# EAGLE board adns5090_breakout (EAGLE 9.7.0)
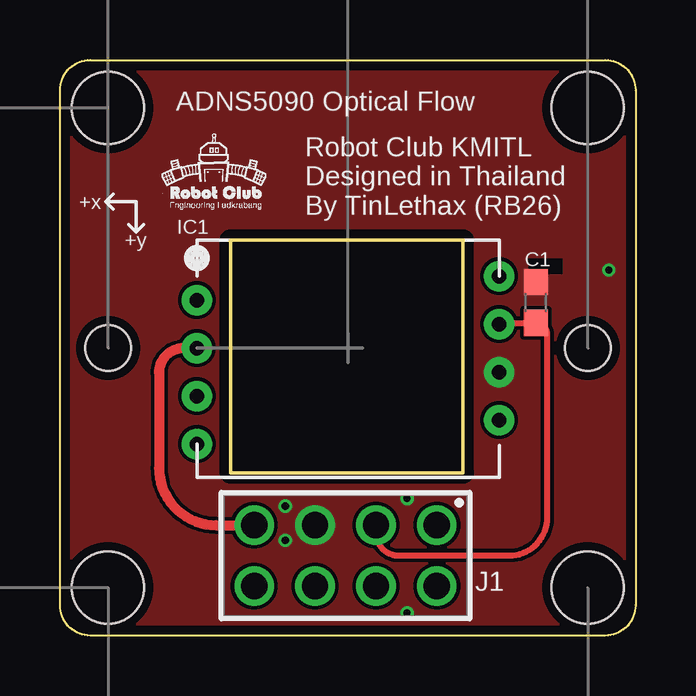
[diagram p0: board, top side]
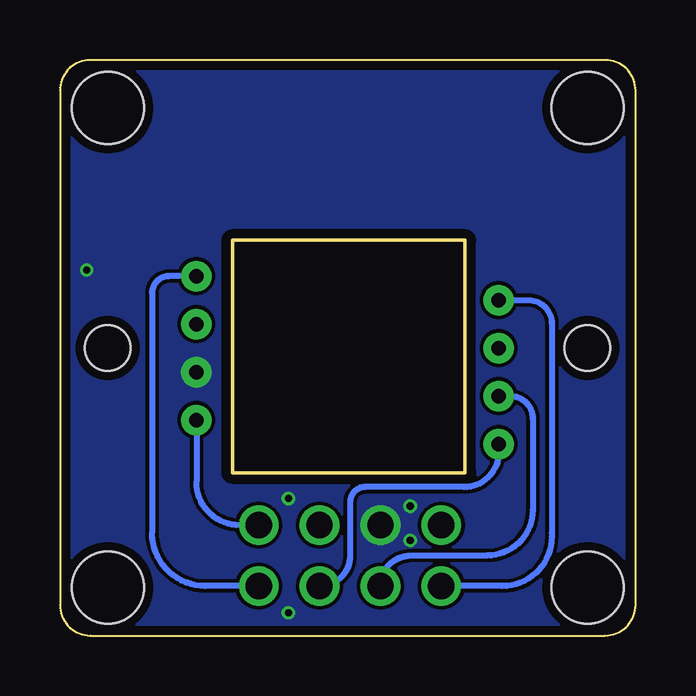
[diagram p1: board, bottom side, seen from below]

Size 24 x 24 mm. Coordinates in mm from the lower left corner, seen from the top.
Outline: 0,1.27 0,22.73 arc-90 1.27,24 22.73,24 arc-90 24,22.73 24,1.27 arc-90 22.73,0 1.27,0 arc-90 0,1.27
Copper layers (1*16): Top 0.035559375mm / dielectric 1.6mm / Bottom 0.035559375mm
Design rules "oshpark-2layer.edru": minimum track width 6mil, minimum drill 10mil, track to track 6mil, track to pad 6mil, pad to pad 6mil, via to via 6mil, smd to smd 6mil, copper to edge 15mil, drill to drill 6mil, minimum pad ring 5mil, minimum via ring 5mil, stop-mask expansion 2.5mil, vias tented up to drill 0mil, thermal gap 10mil
Holes 1.9 mm at 22.01,11.98 2.01,11.98
Holes 3 mm at 2,2 22,2 2,22 22,22
tRestrict: area 8.1,7.8 to 16,15.7; area 19.5,15.1 to 21,15.7

## Footprints (pad centres in the part's own frame; a part is rotated, then mirrored left to right if it is on the bottom)
C0603 = smd 1.1 x 1: 1 -0.85,0; 2 0.85,0
WEIRD_DIP8 = drill 0.6 pad 1.27: P$1 -6.3,2; P$2 -6.3,0; P$3 -6.3,-2; P$4 -6.3,-4; P$5 6.3,-3; P$6 6.3,-1; P$7 6.3,1; P$8 6.3,3
61300821121 = drill 1.1: 1 -3.81,-1.27; 2 -3.81,1.27; 3 -1.27,-1.27; 4 -1.27,1.27; 5 1.27,-1.27; 6 1.27,1.27; 7 3.81,-1.27; 8 3.81,1.27

## Placement (x,y rotation side)
C1  0.1uF  [C0603]  19.84,13.89 90 top
IC1  ADNS5090  [WEIRD_DIP8]  12.01,11.98 0 top
J1  61300821121  [61300821121]  11.91,3.33 180 top

## Library data of the parts
C1 = adafruit
IC1 = adns_5050
J1 = Wurth_Connectors_WR-PHD; DATASHEET-URL: https://www.we-online.com/catalog/datasheet/61300821121.pdf; GENDER: Pin Header; IR: 3A; MOUNT: THT; PACKAGING: Bag; PART-NUMBER: 61300821121; PINS: 8; PITCH: 2.54mm; ROWS: Dual; TYPE: Board Stacker

## Nets
3V3: C1.1 IC1.P$7 J1.3
/CS: IC1.P$4 J1.4
CLK: IC1.P$5 J1.1
GND: C1.2 IC1.P$6 J1.5
INT: IC1.P$3 J1.6
LED_K: IC1.P$2 J1.7
SI: IC1.P$8 J1.2
SO: IC1.P$1 J1.8

## Tracks (layer width: path | path; a pad name or v marks a point on that pad's centre or on a via)
3V3
  Top 0.254: J1.3 13.18,4.29 arc90 14.13,3.33 18.73,3.33 arc90 20.32,4.92 20.32,12.56 arc90 C1.1 18.37,13.04 arc90 IC1.P$7
/CS
  Bottom 0.254: IC1.P$4 arc-90 IC1.P$4 5.71,7.62 arc90 7.14,6.19 11.27,6.19 arc-90 11.91,5.56 11.91,3.33 arc90 J1.4
CLK
  Bottom 0.254: IC1.P$5 18.31,6.41 arc-90 16.51,4.6 J1.1
GND  (via drill 0.3)
  other vias: 22.89,15.24 9.39,5.4 14.47,5.71 14.47,0.95 9.39,3.97
  pour Top (rank 6, no thermals): 0.01,0.14 24.01,0.14 24.01,23.91 0.01,23.91
  pour Bottom (rank 6, no thermals): 0.02,0.15 24,0.15 24,23.89 0.02,23.89
INT
  Bottom 0.254: IC1.P$3 5.22,9.98 arc90 4.29,9.05 4.29,5.24 arc90 6.19,3.33 9.37,3.33 arc-90 J1.6
LED_K
  Top 0.406: IC1.P$2 5.16,11.98 arc90 4.13,10.95 4.13,6.99 arc90 6.51,4.6 J1.7
SI
  Bottom 0.254: IC1.P$8 19.46,14.98 arc-90 20.16,14.29 20.16,4.29 arc-90 17.94,2.06 J1.2
SO
  Bottom 0.254: IC1.P$1 4.46,13.98 arc90 3.49,13.02 3.49,4.29 3.49,4.13 arc90 5.56,2.06 J1.8

## Text on the board
tPlace: ADNS5090 Optical Flow | +x | Robot Club KMITL / Designed in Thailand / By TinLethax (RB26) | +y